# EAGLE board dashv1 (EAGLE 9.4.2)
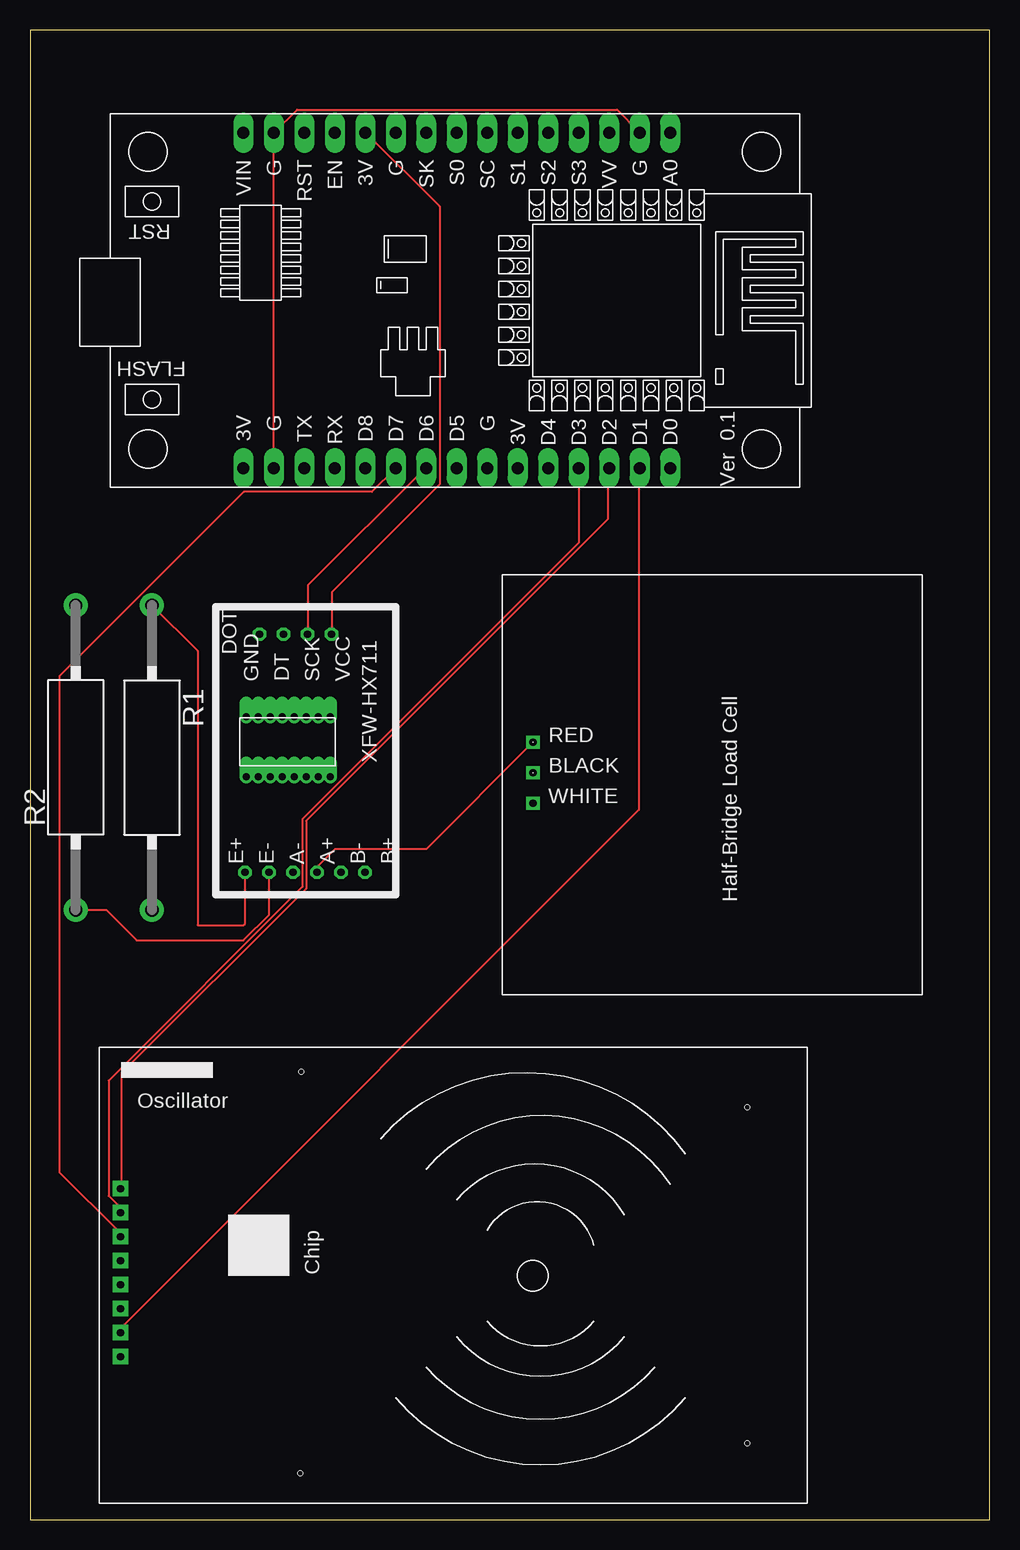
[diagram p0: board, top side]
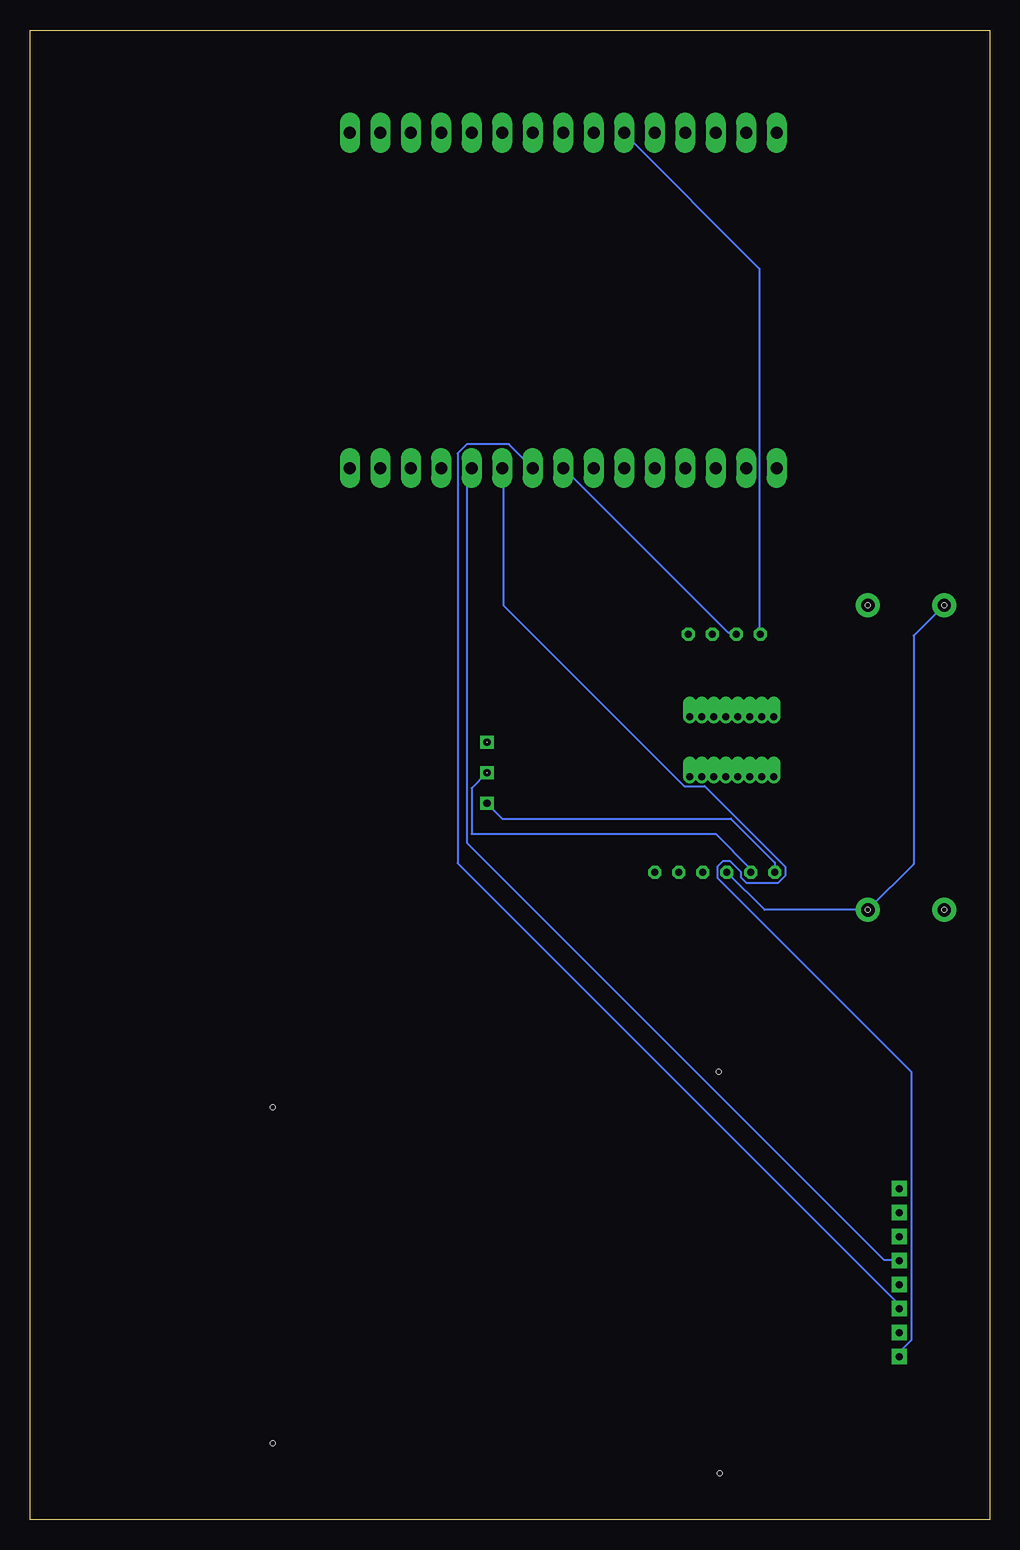
[diagram p1: board, bottom side, seen from below]

Size 79.99 x 124.13 mm. Coordinates in mm from the lower left corner, seen from the top.
Outline: 0,0 79.99,0 79.99,124.13 0,124.13 0,0
Copper layers (1*16): Top 0.035mm / dielectric 1.5mm / Bottom 0.035mm
Design rules "default": minimum track width 6mil, minimum drill 0.35mm, track to track 6mil, track to pad 6mil, pad to pad 6mil, via to via 6mil, smd to smd 6mil, copper to edge 40mil, drill to drill 6mil, minimum pad ring 10mil, minimum via ring 8mil, stop-mask expansion 4mil, vias tented up to drill 0mil, thermal gap 10mil
Holes 0.4 mm at 10.16,76.2 3.81,76.2 3.81,50.8 10.16,50.8
Holes 0 mm at 41.91,64.77 41.91,62.23

## Footprints (pad centres in the part's own frame; a part is rotated, then mirrored left to right if it is on the bottom)
AC03 = drill 1.1 pad 2: 1 -12.7,0; 2 12.7,0
NODEMCU = drill 1 pad 1.676 long: 1 -13.97,17.78; 2 -13.97,15.24; 3 -13.97,12.7; 4 -13.97,10.16; 5 -13.97,7.62; 6 -13.97,5.08; 7 -13.97,2.54; 8 -13.97,0; 9 -13.97,-2.54; 10 -13.97,-5.08; 11 -13.97,-7.62; 12 -13.97,-10.16; 13 -13.97,-12.7; 14 -13.97,-15.24; 15 -13.97,-17.78; 16 13.97,-17.78; 17 13.97,-15.24; 18 13.97,-12.7; 19 13.97,-10.16; 20 13.97,-7.62; 21 13.97,-5.08; 22 13.97,-2.54; 23 13.97,0; 24 13.97,2.54; 25 13.97,5.08; 26 13.97,7.62; 27 13.97,10.16; 28 13.97,12.7; 29 13.97,15.24; 30 13.97,17.78
HX711 = drill 0.6 octagon: A+ 1.87,6.56; A- 1.87,8.56; B+ 1.87,2.56; B- 1.87,4.56; DT 21.71,9.35; E+ 1.87,12.56; E- 1.87,10.56; GND 21.71,11.35; SCK 21.71,7.35; VCC 21.71,5.35 | drill 0.6 offset: S0 9.84,12.47; S1 9.84,11.47; S2 9.84,10.47; S3 9.84,9.47; S4 9.84,8.47; S5 9.84,7.47; S6 9.84,6.47; S7 9.84,5.47; S8 14.84,5.47; S9 14.84,6.47; S10 14.84,7.47; S11 14.84,8.47; S12 14.84,9.47; S13 14.84,10.47; S14 14.84,11.47; S15 14.84,12.47
RFIDCUSTOM = drill 0.6 pad 1.27 square: 3.3V 57.22,25.79; GND 57.22,21.79; IRQ 57.22,19.79; MISO 57.22,17.79; MOSI 57.22,15.79; RST 57.22,23.79; SCK 57.22,13.79; SDA 57.22,11.79 | hole 0.4: 5,33; 5,5; 42.26,35.5; 42.18,2.06
HALFBRIDGE = drill 0.6 square: P$1 13.97,2.54; P$2 16.51,2.54; P$3 19.05,2.54

## Placement (x,y rotation side)
R1  1000 ohm  [AC03]  10.16,63.5 270 top
R2  1000 ohm  [AC03]  3.81,63.5 90 top
U$1  NODEMCU  [NODEMCU]  35.56,101.6 270 top
U$2  HX1711  [HX711]  30.48,52.07 90 top
U$3  RFIDCUSTOM  [RFIDCUSTOM]  64.77,39.37 180 top
U$4  HALFBRIDGE  [HALFBRIDGE]  39.37,78.74 270 top

## Library data of the parts
R1 R2 = resistor-power; OC_FARNELL: unknown; OC_NEWARK: unknown
U$1 = nodemcu
U$2 = hx1711custom
U$3 = RFID Custom
U$4 = HalfBridge

## Nets
3V: U$1.16
GND: U$1.2 U$1.14 U$1.17
N$1: R1.1 U$2.E+ U$4.P$3
N$2: R1.2 R2.2 U$2.A-
N$3: R2.1 U$2.E- U$4.P$2
N$4: U$2.A+ U$4.P$1
N$5: U$1.10 U$2.GND
N$6: U$1.11 U$2.VCC
N$7: U$1.23 U$2.DT
N$8: U$1.22 U$2.SCK
N$9: U$1.25 U$3.3.3V
N$10: U$1.24 U$3.GND
N$11: U$1.29 U$3.RST
N$12: U$1.21 U$3.MOSI
N$13: U$1.28 U$3.SDA
N$14: U$1.26 U$3.MISO
N$15: U$1.27 U$3.SCK

## Tracks (layer width: path | path; a pad name or v marks a point on that pad's centre or on a via)
GND
  Top 0.152: U$1.17 20.27,87.63 20.27,115.52 U$1.14 22.25,117.5 48.92,117.5 50.75,115.67 U$1.2
N$1
  Top 0.152: R1.1 13.97,72.39 13.97,49.53 17.78,49.53 17.92,49.67 U$2.E+
  Bottom 0.152: U$4.P$3 40.64,58.42 21.59,58.42 17.92,54.75 U$2.E+
N$2
  Bottom 0.152: U$2.A- 18.78,50.8 R1.2 6.35,54.61 6.35,73.66 R2.2
N$3
  Top 0.152: R2.1 6.35,50.8 8.89,48.26 17.78,48.26 19.92,50.4 U$2.E-
  Bottom 0.152: U$4.P$2 43.18,60.96 43.18,57.15 22.86,57.15 19.92,54.21 U$2.E-
N$4
  Top 0.152: U$4.P$1 33.02,55.88 25.4,55.88 23.92,54.4 U$2.A+
N$5
  Bottom 0.152: U$2.GND 19.2,73.91 19.2,104.24 30.48,115.52 U$1.10
N$6
  Top 0.152: U$2.VCC 25.15,73.91 25.15,77.27 34.14,86.26 34.14,109.42 28.04,115.52 U$1.11
N$7
  Bottom 0.152: U$2.DT 21.18,73.91 21.79,73.91 35.51,87.63 U$1.23
N$8
  Top 0.152: U$2.SCK 23.16,73.91 23.16,77.88 32.92,87.63 U$1.22
N$9
  Bottom 0.152: U$3.3.3V 7.47,13.72 7.47,14.02 6.55,14.94 6.55,37.34 22.71,53.49 22.71,54.41 22.25,54.86 21.64,54.86 20.73,53.95 20.73,53.49 20.27,53.03 17.68,53.03 17.07,53.65 17.07,54.41 23.77,61.11 25.45,61.11 40.54,76.2 40.54,87.63 U$1.25
N$10
  Bottom 0.152: U$1.24 40.08,89.61 43.59,89.61 44.35,88.85 44.35,54.71 7.62,17.98 7.62,17.68 U$3.GND
N$11
  Top 0.152: U$3.RST 7.62,15.7 7.62,16 50.75,59.13 50.75,87.63 U$1.29
N$12
  Top 0.152: U$1.21 28.5,85.65 17.83,85.65 2.44,70.26 2.44,28.96 7.47,23.93 7.47,23.62 U$3.MOSI
N$13
  Top 0.152: U$3.SDA 7.62,27.58 7.62,37.19 23.01,52.58 23.01,58.22 48.16,83.36 48.16,87.63 U$1.28
N$14
  Bottom 0.152: U$3.MISO 7.62,21.64 8.84,21.64 43.59,56.39 43.59,87.33 43.28,87.63 U$1.26
N$15
  Top 0.152: U$1.27 45.72,81.38 22.71,58.37 22.71,52.73 6.55,36.58 6.55,26.98 7.47,26.06 7.47,25.6 U$3.SCK